# EAGLE board STM32f407layout (EAGLE 7.5.0)
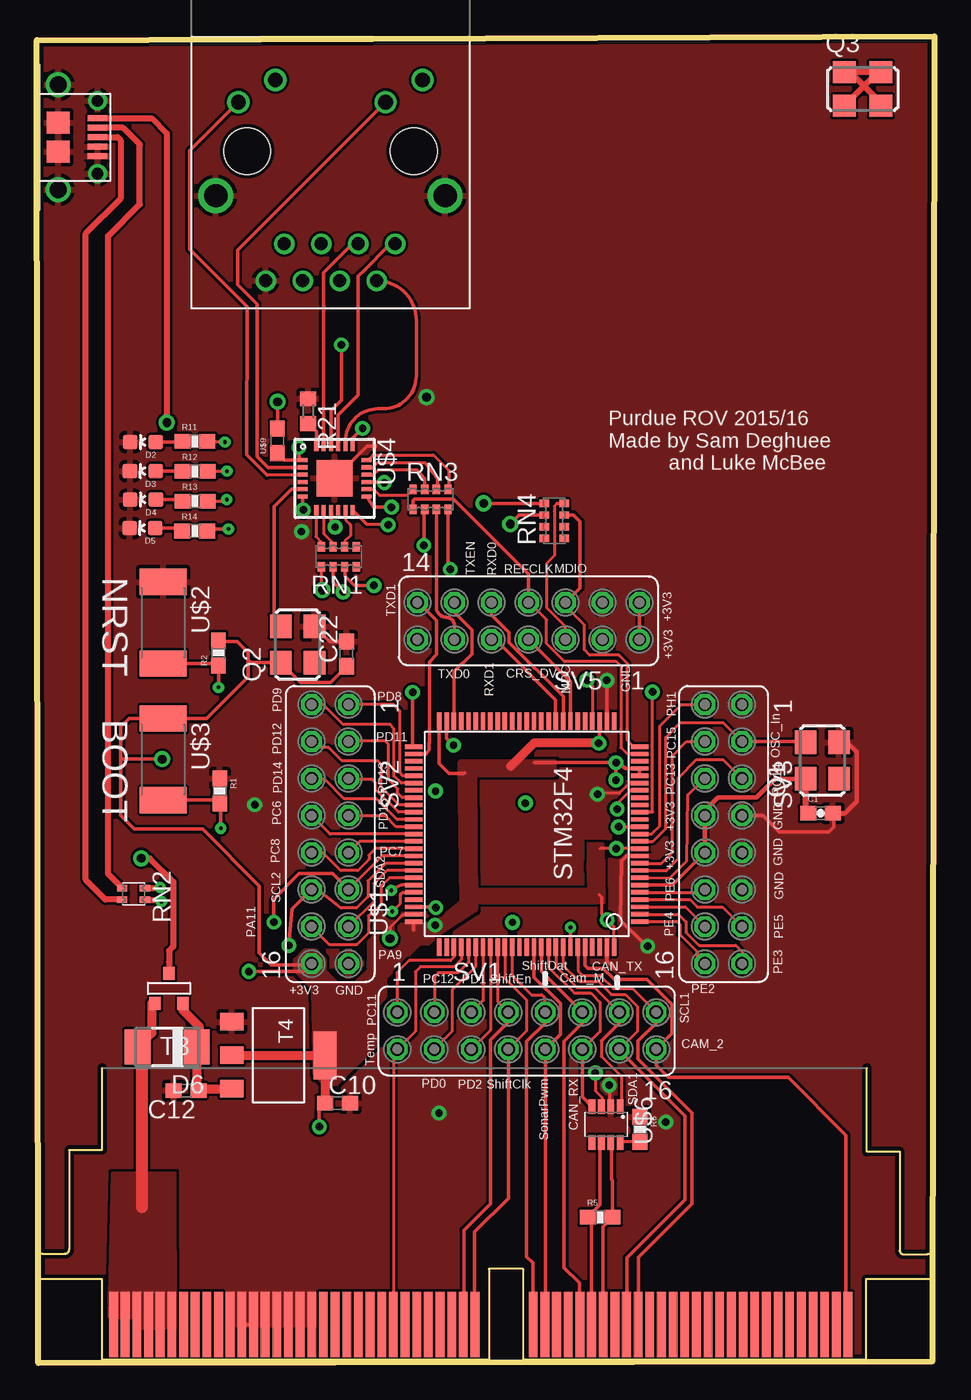
[diagram p0: board, top side]
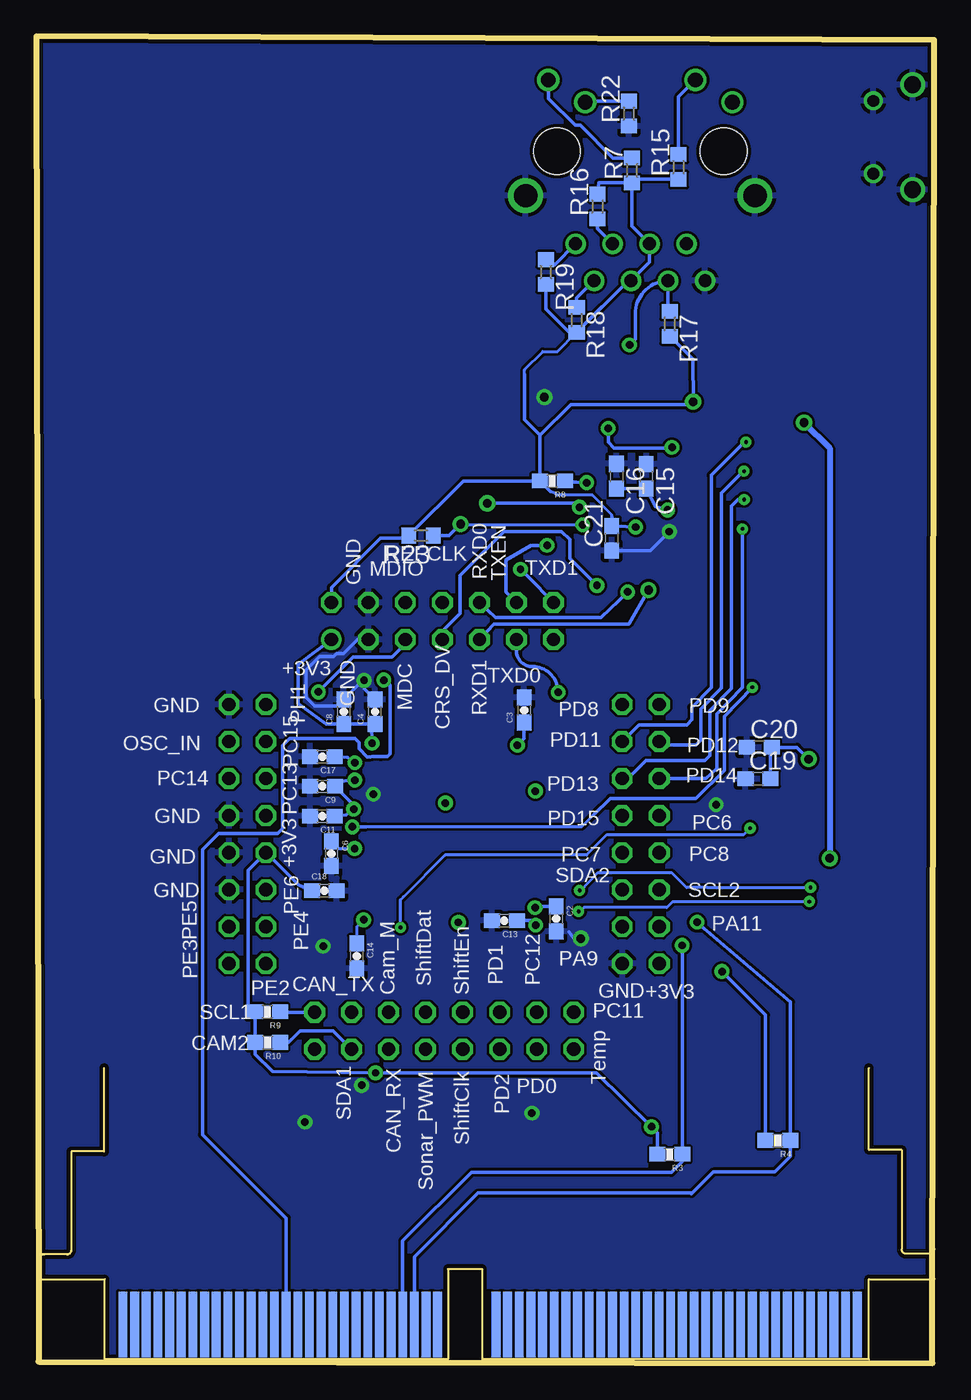
[diagram p1: board, bottom side, seen from below]

Size 61.64 x 91.04 mm. Coordinates in mm from the lower left corner, seen from the top.
Outline: 0.13,0 0.03,90.79 61.64,91.04 61.49,0.1 0.13,0
Copper layers (1*16): Top 0.035mm / dielectric 1.5mm / Bottom 0.035mm
Design rules "GoldPhoenix": minimum track width 7mil, minimum drill 10mil, track to track 7mil, track to pad 7mil, pad to pad 7mil, via to via 7mil, smd to smd 7mil, copper to edge 10mil, drill to drill 8mil, minimum pad ring 10mil, minimum via ring 10mil, stop-mask expansion 4mil, vias tented up to drill 25mil, thermal gap 10mil
Net classes: 1 DiffPair: width 0.254 mm

## Footprints (pad centres in the part's own frame; a part is rotated, then mirrored left to right if it is on the bottom)
0603-CAP = smd 1.1 x 1: 1 -0.85,0; 2 0.85,0
C0603 = smd 1.1 x 1: 1 -0.85,0; 2 0.85,0
LED-0603 = smd 1 x 1: A 0,-0.877; C 0,0.877
DO-214AC = smd 1.8 x 2.4: A 2.025,0; C -2.025,0
ASF = smd 1.6 x 1.5: 1 -1.25,-1.15; 2 1.25,-1.15; 3 1.25,1.15; 4 -1.25,1.15
0603-RES = smd 1.1 x 1: 1 -0.85,0; 2 0.85,0
R0603 = smd 1 x 1.1: 1 -0.85,0; 2 0.85,0
CAY16 = smd 0.5 x 0.65: 1 -1.2,-0.675; 2 -0.4,-0.675; 3 0.4,-0.675; 4 1.2,-0.675; 5 1.2,0.675; 6 0.4,0.675; 7 -0.4,0.675; 8 -1.2,0.675
EXBV4V = smd 0.45 x 0.7: 1 -0.4,-0.775; 2 0.4,-0.775; 3 0.4,0.775; 4 -0.4,0.775
FE08-2 = drill 0.914 octagon: 1 -8.89,1.27; 2 -8.89,-1.27; 3 -6.35,1.27; 4 -6.35,-1.27; 5 -3.81,1.27; 6 -3.81,-1.27; 7 -1.27,1.27; 8 -1.27,-1.27; 9 1.27,1.27; 10 1.27,-1.27; 11 3.81,1.27; 12 3.81,-1.27; 13 6.35,1.27; 14 6.35,-1.27; 15 8.89,1.27; 16 8.89,-1.27
FE07-2 = drill 0.914: 1 -7.62,1.27 | drill 0.914 octagon: 2 -7.62,-1.27; 3 -5.08,1.27; 4 -5.08,-1.27; 5 -2.54,1.27; 6 -2.54,-1.27; 7 0,1.27; 8 0,-1.27; 9 2.54,1.27; 10 2.54,-1.27; 11 5.08,1.27; 12 5.08,-1.27; 13 7.62,1.27; 14 7.62,-1.27
SOT-23 = smd 0.787 x 0.889: 1 0.025,-1.016; 2 -0.94,1.016; 3 0.991,1.016
SOT223 = smd 1.2 x 1.6: GND -2.3,-3.2; VIN 2.3,-3.2; VOUT 0,-3.2 | smd 3.3 x 1.6: TAB 0,3.2
LQFP100 = smd 0.3 x 1.2: P1 -6,-7.75; P2 -5.5,-7.75; P3 -5,-7.75; P4 -4.5,-7.75; P5 -4,-7.75; P6 -3.5,-7.75; P7 -3,-7.75; P8 -2.5,-7.75; P9 -2,-7.75; P10 -1.5,-7.75; P11 -1,-7.75; P12 -0.5,-7.75; P13 0,-7.75; P14 0.5,-7.75; P15 1,-7.75; P16 1.5,-7.75; P17 2,-7.75; P18 2.5,-7.75; P19 3,-7.75; P20 3.5,-7.75; P21 4,-7.75; P22 4.5,-7.75; P23 5,-7.75; P24 5.5,-7.75; P25 6,-7.75; P51 6,7.75; P52 5.5,7.75; P53 5,7.75; P54 4.5,7.75; P55 4,7.75; P56 3.5,7.75; P57 3,7.75; P58 2.5,7.75; P59 2,7.75; P60 1.5,7.75; P61 1,7.75; P62 0.5,7.75; P63 0,7.75; P64 -0.5,7.75; P65 -1,7.75; P66 -1.5,7.75; P67 -2,7.75; P68 -2.5,7.75; P69 -3,7.75; P70 -3.5,7.75; P71 -4,7.75; P72 -4.5,7.75; P73 -5,7.75; P74 -5.5,7.75; P75 -6,7.75 | smd 1.2 x 0.3: P26 7.75,-6; P27 7.75,-5.5; P28 7.75,-5; P29 7.75,-4.5; P30 7.75,-4; P31 7.75,-3.5; P32 7.75,-3; P33 7.75,-2.5; P34 7.75,-2; P35 7.75,-1.5; P36 7.75,-1; P37 7.75,-0.5; P38 7.75,0; P39 7.75,0.5; P40 7.75,1; P41 7.75,1.5; P42 7.75,2; P43 7.75,2.5; P44 7.75,3; P45 7.75,3.5; P46 7.75,4; P47 7.75,4.5; P48 7.75,5; P49 7.75,5.5; P50 7.75,6; P76 -7.75,6; P77 -7.75,5.5; P78 -7.75,5; P79 -7.75,4.5; P80 -7.75,4; P81 -7.75,3.5; P82 -7.75,3; P83 -7.75,2.5; P84 -7.75,2; P85 -7.75,1.5; P86 -7.75,1; P87 -7.75,0.5; P88 -7.75,0; P89 -7.75,-0.5; P90 -7.75,-1; P91 -7.75,-1.5; P92 -7.75,-2; P93 -7.75,-2.5; P94 -7.75,-3; P95 -7.75,-3.5; P96 -7.75,-4; P97 -7.75,-4.5; P98 -7.75,-5; P99 -7.75,-5.5; P100 -7.75,-6
SW_2512 = smd 1.8 x 3.2: 1 -2.8,0; 2 2.8,0
24-QFN = smd 0.28 x 0.69: 1 -1.25,-2.195; 2 -0.75,-2.195; 3 -0.25,-2.195; 4 0.25,-2.195; 5 0.75,-2.195; 6 1.25,-2.195; 13 1.25,2.195; 14 0.75,2.195; 15 0.25,2.195; 16 -0.25,2.195; 17 -0.75,2.195; 18 -1.25,2.195 | smd 0.69 x 0.28: 7 2.195,-1.25; 8 2.195,-0.75; 9 2.195,-0.25; 10 2.195,0.25; 11 2.195,0.75; 12 2.195,1.25; 19 -2.195,1.25; 20 -2.195,0.75; 21 -2.195,0.25; 22 -2.195,-0.25; 23 -2.195,-0.75; 24 -2.195,-1.25 | smd 2.5 x 2.5: VSS_PAD 0,0
MICRO_B = smd 1.5 x 1.55: GND1 -1,1.45; GND2 1,1.45 | drill 0.8: GND3 -2.5,4.15; GND4 2.5,4.15 | drill 1.15: GND7 -3.598,1.45; GND8 3.598,1.45 | smd 0.4 x 1.35: P1 -1.3,4.15; P2 -0.65,4.15; P3 0,4.15; P4 0.65,4.15; P5 1.3,4.15
SOT23-8L = smd 0.45 x 1: 1 -0.975,-1.225; 2 -0.325,-1.225; 3 0.325,-1.225; 4 0.975,-1.225; 5 0.975,1.225; 6 0.325,1.225; 7 -0.325,1.225; 8 -0.975,1.225
J00-0065NL = drill 0.889 pad 1.016: 1 1.27,2.54; 2 0,0; 3 -1.27,2.54; 4 -2.54,0; 5 -3.81,2.54; 6 -5.08,0; 7 -6.35,2.54; 8 -7.62,0 | drill 1.016 pad 1.143: 9 3.15,13.792; 10 0.61,12.268; 11 -6.96,13.792; 12 -9.5,12.268 | drill 1.6 pad 1.727: 15 4.699,5.842; 16 -11.049,5.842 | hole 3.2: -8.89,8.89; 2.54,8.89
HSC8-60PINOUUT = smd 0.6 x 4.5 bottom: B1 0.8,2.4; B2 1.6,2.4; B3 2.4,2.4; B4 3.2,2.4; B5 4,2.4; B6 4.8,2.4; B7 5.6,2.4; B8 6.4,2.4; B9 7.2,2.4; B10 8,2.4; B11 8.8,2.4; B12 9.6,2.4; B13 10.4,2.4; B14 11.2,2.4; B15 12,2.4; B16 12.8,2.4; B17 13.6,2.4; B18 14.4,2.4; B19 15.2,2.4; B20 16,2.4; B21 16.8,2.4; B22 17.6,2.4; B23 18.4,2.4; B24 19.2,2.4; B25 20,2.4; B26 20.8,2.4; B27 21.6,2.4; B28 22.4,2.4; B29 23.2,2.4; B30 24,2.4; B31 24.8,2.4; B32 25.6,2.4; B33 29.6,2.4; B34 30.4,2.4; B35 31.2,2.4; B36 32,2.4; B37 32.8,2.4; B38 33.6,2.4; B39 34.4,2.4; B40 35.2,2.4; B41 36,2.4; B42 36.8,2.4; B43 37.6,2.4; B44 38.4,2.4; B45 39.2,2.4; B46 40,2.4; B47 40.8,2.4; B48 41.6,2.4; B49 42.4,2.4; B50 43.2,2.4; B51 44,2.4; B52 44.8,2.4; B53 45.6,2.4; B54 46.4,2.4; B55 47.2,2.4; B56 48,2.4; B57 48.8,2.4; B58 49.6,2.4; B59 50.4,2.4; B60 51.2,2.4 | smd 0.6 x 4.5: T1 0.8,2.4; T2 1.6,2.4; T3 2.4,2.4; T4 3.2,2.4; T5 4,2.4; T6 4.8,2.4; T7 5.6,2.4; T8 6.4,2.4; T9 7.2,2.4; T10 8,2.4; T11 8.8,2.4; T12 9.6,2.4; T13 10.4,2.4; T14 11.2,2.4; T15 12,2.4; T16 12.8,2.4; T17 13.6,2.4; T18 14.4,2.4; T19 15.2,2.4; T20 16,2.4; T21 16.8,2.4; T22 17.6,2.4; T23 18.4,2.4; T24 19.2,2.4; T25 20,2.4; T26 20.8,2.4; T27 21.6,2.4; T28 22.4,2.4; T29 23.2,2.4; T30 24,2.4; T31 24.8,2.4; T32 25.6,2.4; T33 29.6,2.4; T34 30.4,2.4; T35 31.2,2.4; T36 32,2.4; T37 32.8,2.4; T38 33.6,2.4; T39 34.4,2.4; T40 35.2,2.4; T41 36,2.4; T42 36.8,2.4; T43 37.6,2.4; T44 38.4,2.4; T45 39.2,2.4; T46 40,2.4; T47 40.8,2.4; T48 41.6,2.4; T49 42.4,2.4; T50 43.2,2.4; T51 44,2.4; T52 44.8,2.4; T53 45.6,2.4; T54 46.4,2.4; T55 47.2,2.4; T56 48,2.4; T57 48.8,2.4; T58 49.6,2.4; T59 50.4,2.4; T60 51.2,2.4
0603 = smd 1.1 x 1: 1 -0.85,0; 2 0.85,0

## Placement (x,y rotation side)
C1  [0603-CAP]  53.83,37.73 0 top
C2  0.22uF  [0603-CAP]  25.96,30.49 270 bottom
C3  0.22uF  [0603-CAP]  28.16,44.81 90 bottom
C4  0.1uF  [0603-CAP]  38.4,44.7 90 bottom
C6  0.1uF  [0603-CAP]  41.39,34.96 270 bottom
C8  4.7uF  [0603-CAP]  40.54,44.7 90 bottom
C9  0.1uF  [0603-CAP]  42,39.58 180 bottom
C10  0.22uF  [C0603]  20.66,17.83 0 top
C11  0.1uF  [0603-CAP]  42.01,37.53 180 bottom
C12  0.22uF  [C0603]  10.28,18.7 180 top
C13  0.1uF  [0603-CAP]  29.52,30.37 180 bottom
C14  0.1uF  [0603-CAP]  39.66,27.93 270 bottom
C15  1uF  [C0603]  19.78,60.86 270 bottom
C16  1nF  [C0603]  21.83,60.86 270 bottom
C17  1uF  [0603-CAP]  42.01,41.62 180 bottom
C18  0.1uF  [0603-CAP]  41.87,32.41 0 bottom
C19  100nF  [C0603]  12.11,40.1 0 bottom
C20  100nF  [C0603]  12.03,42.25 0 bottom
C21  100nF  [C0603]  22.14,56.6 90 bottom
C22  0.01uF  [C0603]  21.29,48.67 90 top
D2  [LED-0603]  7.32,63.21 90 top
D3  [LED-0603]  7.3,61.21 90 top
D4  [LED-0603]  7.32,59.25 90 top
D5  [LED-0603]  7.27,57.31 90 top
D6  [DO-214AC]  8.98,21.69 180 top
Q1  ASF  [ASF]  53.94,41.35 90 top
Q2  ASV-8  [ASF]  17.93,49.31 90 top
Q3  ASF  [ASF]  56.71,87.43 0 top
R1  10k  [0603-RES]  12.58,39.26 270 top
R2  10k  [0603-RES]  12.5,48.74 90 top
R3  4.7K  [0603-RES]  18.16,14.33 180 bottom
R4  4.7K  [0603-RES]  10.75,15.29 180 bottom
R5  120  [0603-RES]  38.7,10.01 0 top
R6  100K  [0603-RES]  41.42,16.05 270 top
R7  250R  [R0603]  20.77,81.85 90 bottom
R8  10K  [0603-RES]  26.23,60.54 180 bottom
R9  4.7K  [0603-RES]  45.78,24.11 180 bottom
R10  4.7K  [0603-RES]  45.77,22.01 180 bottom
R11  83  [0603-RES]  10.88,63.24 0 top
R12  83  [0603-RES]  10.89,61.19 0 top
R13  83  [0603-RES]  10.89,59.15 0 top
R14  83  [0603-RES]  10.87,57.1 0 top
R15  250R  [R0603]  17.56,82.08 90 bottom
R16  49.9R  [R0603]  23.13,79.37 90 bottom
R17  49.9R  [R0603]  18.17,71.32 270 bottom
R18  49.9R  [R0603]  24.55,71.59 270 bottom
R19  49.9R  [R0603]  26.67,74.88 270 bottom
R21  12.1K  [R0603]  18.65,65.32 270 top
R22  4.7K  [R0603]  20.97,85.75 90 bottom
R23  1.5k  [R0603]  35.24,56.79 180 bottom
RN1  [CAY16]  20.76,55.34 0 top
RN2  [EXBV4V]  6.67,32.2 270 top
RN3  [CAY16]  27.05,59.28 180 top
RN4  [CAY16]  35.54,57.8 270 top
SV1  [FE08-2]  33.66,22.8 0 top
SV2  [FE08-2]  20.16,36.3 270 top
SV3  [FE08-2]  47.16,36.3 270 top
SV5  [FE07-2]  33.77,50.93 180 top
T3  FDN340P  [SOT-23]  9.13,25.71 180 top
T4  AP1117_LIN_REG  [SOT223]  16.61,21.12 270 top
U$1  STM32F4  [LQFP100]  33.66,36.3 90 top
U$2  SWITCH  [SW_2512]  8.7,50.81 270 top
U$3  SWITCH  [SW_2512]  8.7,41.43 270 top
U$4  LAN8720LAN8720  [24-QFN]  20.46,60.72 270 top
U$5  MICROUSB  [MICRO_B]  0.05,84.12 270 top
U$6  MAX3051MAX3051  [SOT23-8L]  39.11,16.37 180 top
U$7  J00-0065NL  [J00-0065NL]  23.36,74.27 0 top
U$8  HSC8PART-60  [HSC8-60PINOUUT]  4.5,0.25 0 top
U$9  [0603]  16.55,63.29 90 top

## Library data of the parts
C1-C4 C6 C8 C9 C11 C13 C14 C17 C18 R1-R6 R8-R14 = SparkFun-Passives
C10 C12 = rcl
C15 C16 C19-C21 = eagle-ltspice; SPICEMODEL: NONE; SPICEPREFIX: C
C22 R7 R15-R19 R21-R23 = resistor
D2-D5 = SparkFun-LED
D6 U$2 U$3 = DiscreteComponents
Q1 Q3 = DiscreteComponents; DIGIKEY: 535-10066-1-ND
Q2 = MicroBoard; DIGIKEY: 535-10066-1-ND
RN1 RN3 RN4 = resistor-dil; OC_FARNELL: unknown; OC_NEWARK: unknown
RN2 = DiscreteComponents; DIGIKEY: RHM1381CT-ND; MF: Rohm Semiconductor; MPN: MNR12ERAPJ220
SV1-SV3 SV5 = con-lsta; OC_FARNELL: unknown; OC_NEWARK: unknown
T3 = DiscreteComponents; DIGIKEY: FDN340PCT-ND
T4 = PowerComponents
U$1 U$5 = Other
U$4 U$7 U$9 = EthernetChip
U$6 = MAX3051 Library
U$8 = Connectors

## Nets
+3V3: C1.1 C4.1 C6.1 C8.1 C9.1 C10.1 C11.1 C13.1 C14.1 C17.1 C18.1 C19.2 C20.2 C21.2 C22.1 Q1.4 Q2.4 R2.2 R3.2 R4.2 R7.1 R8.2 R9.2 R10.2 R15.1 R16.2 R17.2 R18.2 R19.2 R23.2 SV2.16 SV3.8 SV3.10 SV5.1 SV5.2 T4.TAB T4.VOUT U$1.P6 U$1.P11 U$1.P19 U$1.P21 U$1.P22 U$1.P28 U$1.P50 U$1.P75 U$1.P100 U$3.1 U$4.9 U$6.3 U$7.4 U$7.5 U$9.2
+5V: D6.A T3.3 U$8.T1 U$8.T2 U$8.T3 U$8.T4 U$8.T5 U$8.T6
ALT_CAMERA_SERVO_MOTOR_PWM: SV1.16 U$1.P96 U$8.T60
BUS_SPEED: R22.2 U$4.2 U$7.10
CAN_RX: SV1.12 U$1.P91 U$6.4
CAN_TX: SV1.13 U$1.P92 U$6.1
CANH1: R5.2 U$6.7 U$8.T39
CANL1: R5.1 U$6.6 U$8.T38
CRS_DV: RN1.3 SV5.7 U$1.P32
DIFF_RD+ [DiffPair]: R16.1 U$4.23 U$7.3
DIFF_RD- [DiffPair]: R17.1 U$4.22 U$7.6
DIFF_TD+ [DiffPair]: R19.1 U$4.21 U$7.1
DIFF_TD- [DiffPair]: R18.1 U$4.20 U$7.2
GND: C1.2 C2.2 C3.2 C4.2 C6.2 C8.2 C9.2 C10.2 C11.2 C12.2 C13.2 C14.2 C15.1 C16.1 C17.2 C18.2 C19.1 C20.1 C21.1 C22.2 D2.C D3.C D4.C D5.C Q1.2 Q2.2 R1.1 R6.1 R21.1 R22.1 SV2.15 SV3.1 SV3.7 SV3.9 SV3.11 SV5.3 SV5.4 T4.GND U$1.P10 U$1.P20 U$1.P27 U$1.P74 U$1.P99 U$2.1 U$4.VSS_PAD U$5.GND1 U$5.GND2 U$5.GND3 U$5.GND4 U$5.GND7 U$5.GND8 U$5.P4 U$5.P5 U$6.2 U$7.8 U$7.15 U$7.16 U$8.T11 U$8.T12 U$8.T13 U$8.T14 U$8.T15 U$8.T16 U$8.T17 U$8.T18
GREEN: R7.2 U$7.9
I2C1_SCL: R9.1 SV1.15 U$1.P95 U$8.T42
I2C1_SDA: R10.1 SV1.14 U$1.P93 U$8.T41
I2C3_SCL: R3.1 SV2.12 U$1.P67 U$8.B36
I2C3_SDA: R4.1 SV2.11 U$1.P66 U$8.B35
LINK/ACT: U$4.3 U$7.12
MAIN_CAMERA_SERVO_MOTOR_PWM: SV1.11 U$1.P90 U$8.T37
MDC: RN4.8 SV5.5 U$1.P16
MDE: RN4.1 U$4.13
MDIO: RN4.7 SV5.6 U$1.P25
N$1: C2.1 U$1.P73
N$2: C3.1 U$1.P49
N$3: R1.2 U$1.P94 U$3.2
N$4: R2.1 U$1.P14 U$2.2
N$6: C15.2 C16.2 U$4.6
N$9: RN1.6 U$4.11
N$11: R6.2 U$6.8
N$12: RN2.1 U$5.P2
N$13: RN3.4 U$4.14
N$14: D3.A R12.1
N$15: D5.A R14.1
N$16: RN3.3 U$4.16
N$17: D4.A R13.1
N$18: D2.A R11.1
N$19: RN3.2 U$4.17
N$20: RN3.1 U$4.18
N$21: U$4.1 U$4.19 U$9.1
N$22: R21.2 U$4.24
N$23: R23.1 RN4.2 U$4.12
N$24: RN2.2 U$5.P3
N$25: RN1.7 U$4.8
N$26: RN1.8 U$4.7
N$28: Q3.1 Q3.2 Q3.3 Q3.4
N$57: T3.1 U$5.P1
N$58: C12.1 D6.C T3.2 T4.VIN
NRST: R8.1 U$4.15
OSC_IN: Q1.3 SV3.3 U$1.P12
PA0: U$1.P23
PA3: U$1.P26
PA5: U$1.P30
PA6: U$1.P31
PA9: SV2.13 U$1.P68
PA10: SV2.14 U$1.P69
PA13: U$1.P72
PA14: U$1.P76
PA15: U$1.P77
PB0: U$1.P35
PB1: U$1.P36
PB2: U$1.P37
PB10: U$1.P47
PB14: U$1.P53
PB15: U$1.P54
PC0: U$1.P15
PC2: U$1.P17
PC3: U$1.P18
PC6: SV2.8 U$1.P63
PC7: SV2.9 U$1.P64
PC8: SV2.10 U$1.P65
PC10: SV1.1 U$1.P78
PC12: SV1.3 U$1.P80
PC13: SV3.6 U$1.P7
PC14: SV3.5 U$1.P8
PC15: SV3.4 U$1.P9
PD0: SV1.4 U$1.P81
PD1: SV1.5 U$1.P82
PD2: SV1.6 U$1.P83
PD6: U$1.P87
PD7: U$1.P88
PD8: SV2.1 U$1.P55
PD9: SV2.2 U$1.P56
PD10: U$1.P57
PD11: R11.2 SV2.3 U$1.P58
PD12: R12.2 SV2.4 U$1.P59
PD13: R13.2 SV2.5 U$1.P60
PD14: R14.2 SV2.6 U$1.P61
PD15: SV2.7 U$1.P62
PE0: U$1.P97
PE1: U$1.P98
PE2: SV3.16 U$1.P1
PE3: SV3.15 U$1.P2
PE4: SV3.14 U$1.P3
PE5: SV3.13 U$1.P4
PE6: SV3.12 U$1.P5
PE7: U$1.P38
PE8: U$1.P39
PE9: U$1.P40
PE10: U$1.P41
PE11: U$1.P42
PE12: U$1.P43
PE13: U$1.P44
PE14: U$1.P45
PE15: U$1.P46
PH1: SV3.2 U$1.P13
REFCLK: RN3.5 SV5.8 U$1.P24
RXD0: RN1.2 SV5.10 U$1.P33
RXD1: RN1.1 SV5.9 U$1.P34
RXERR: U$4.10
SHIFTREG_CLK: SV1.8 U$1.P85 U$8.T32
SHIFTREG_DATA: SV1.9 U$1.P86 U$8.T33
SHIFTREG_ENABLE: SV1.7 U$1.P84 U$8.T31
SONAR_DAC: U$1.P29 U$8.B46
SONAR_PWM: SV1.10 U$1.P89 U$8.T34
TEMP_BACKUP: SV1.2 U$1.P79 U$8.T25
TXD0: RN3.7 SV5.11 U$1.P51
TXD1: RN3.8 SV5.14 U$1.P52
TXEN: RN3.6 SV5.12 U$1.P48
USB_D+: RN2.3 U$1.P71
USB_D-: RN2.4 U$1.P70
XTAL1: Q2.3 U$4.5
XTAL2: U$4.4
YELLOW: R15.2 U$7.11

## Tracks (layer width: path | path; a pad name or v marks a point on that pad's centre or on a via)
+3V3  (via drill 0.51, 0.6)
  Top 0.203: v38.36,19.92 38.36,18.68 38.8,18.24 38.8,17.61 U$6.3 | U$1.P19 40.76,39.31 39.93,38.48 39.9,38.23 v39.86,38.02 | U$1.P100 39.66,29.93 v39.17,30.42 38.83,30.76 38.83,31.95 38.62,32.15 | U$1.P11 41.39,35.31 v39.8,35.31 38.69,35.31
  Top 0.254: U$1.P75 25.88,30.3 25.88,29.74 | U$1.P50 27.63,42.89 27.63,41.15 28.31,40.47 29.33,40.47 29.37,40.51 | 5.8,41.52 5.8,43.68 6.35,44.23 U$3.1 11.69,44.23 14.53,47.08 14.53,48.25 | 5.8,41.52 5.8,37.57 6.72,36.65 11.39,36.65 15.3,32.75 15.3,28.16 16.12,27.33 18.8,27.33 SV2.16 18.35,26.88 v14.59,26.88 | 14.53,48.25 14.53,48.75 13.76,49.52 12.57,49.52 R2.2 | v39.79,41.2 39.84,41.16 39.89,41.17 40.45,40.8 U$1.P22 U$1.P21 | U$1.P28 38.66,42.56 v38.6,42.54 | v19.42,16.22 19.42,17.44 C10.1 | U$4.9 20.21,57.82 v20.5,57.37 | U$9.2 v16.55,65.96 v16.56,65.97 | v8.63,41.45 5.88,41.45 5.8,41.52 | SV5.2 SV5.1 | C22.1 21.29,47.79 20.2,46.7 18.15,46.7 Q2.4 14.72,48.06 14.53,48.25 | U$1.P6 43.66,32.8 SV3.10 | v39.78,40.01 39.78,40.12 v39.79,41.2 | 34.19,41.2 v39.79,41.2
  Top 0.305: Q1.4 50.68,40.08 49.41,38.81 46.76,38.81 45.89,37.93 SV3.8 SV3.10
  Top 0.406: Q1.4 52.79,37.92 C1.1
  Top 0.61: T4.VOUT T4.TAB C10.1 | v38.6,42.54 34.14,42.54 32.57,40.97
  Bottom 0.203: 26.35,59.81 26,59.67 25.89,59.56 23.49,59.56 22.14,58.21 22.14,58.09 | v39.17,30.42 39.66,29.94 C14.1 | C6.1 40.88,35.31 v39.8,35.31 | 28.14,67.88 28.14,68.17 26.87,69.43 25.86,69.43 R18.2
  Bottom 0.254: v38.6,42.54 38.65,43.79 C4.1 C8.1 41.77,43.85 43.68,45.28 43.68,47.95 SV5.1 | C17.1 40.29,41.56 v39.79,41.2 | C13.1 27.68,30.37 v27.37,30.06 | R4.2 11.6,23.89 v14.59,26.88 | v20.5,57.37 21.87,57.46 C21.2 22.14,58.09 | U$7.4 19.55,75.54 U$7.5 20.77,78.03 R7.1 | U$7.4 20.76,74.27 20.76,74.33 20.78,74.35 20.93,74.35 24.76,70.52 | R15.1 20.53,81.23 R7.1 | R7.1 23.05,81 R16.2 | 26.35,59.81 R8.2 | R8.2 27.08,63.67 | R8.2 32.34,60.54 R23.2 | R23.2 36.09,56.48 | C19.2 11.26,42.17 C20.2 9.44,42.25 v8.63,41.45 | C11.1 40.38,37.61 v39.86,38.02 39.97,38.4 C9.1 40.81,39.92 v39.78,40.01 | R17.2 16.59,68.89 v16.56,65.97 16.75,65.79 24.96,65.79 27.08,63.67 | U$7.4 21.12,74.27 | 24.17,70.35 R18.2 | R18.2 25.09,70.74 26.67,72.32 R19.2 | U$7.4 21.02,74.27 R18.2 | SV5.2 41.39,53.24 38.02,56.61 36.27,56.61 R23.2 | R3.2 19.01,15.81 v19.42,16.22 23.21,19.92 v38.36,19.92 45.44,20.01 46.63,21.2 R10.2 R9.2 47.12,24.61 47.12,33.8 SV3.10 43.66,32.8 C18.1 | 28.14,67.88 28.14,64.74 27.08,63.67
  pour Top (no thermals): 19.07,25.69 17.81,26.95 17.81,27.64 18.45,28.28 19.09,28.28 19.71,27.66 19.71,26.88 20.58,26.01 21.96,26.01 22.9,26.95 22.9,28.9 23.93,29.93 23.93,29.93 24.29,30.07 26.68,30.04 27.67,30.35 29.25,31.63 29.11,41.24 35.5,41.29 35.5,40.4 31.51,40.41 30.38,40.38 30.04,40.4 30.09,31.12 27.61,29.49 27.5,29.49 26.83,28.83 26.26,28.83 23.86,26.43 23.86,25.14 23.26,24.55 23.26,21.91 20.54,19.19 19.83,19.19 19.16,19.85 19.16,21.09
  pour Top: 29.92,31.62 39,31.62 38.9,35.62 37.84,35.66 37.86,34.19 37.82,34.25 37.88,32.51 29.89,32.51 29.89,31.61
+5V
  Top 0.254: D6.A | T3.3 7.91,24.7
  Top 0.61: 7.91,24.7 7.91,22.65 D6.A
  Top 0.813: D6.A 7.23,21.69 7.23,10.71
  pour Top (no thermals): 6.98,2.34 9.52,2.42 9.48,13.06 5.25,13.02 4.99,3.17 6.92,3.06 6.94,2.4
ALT_CAMERA_SERVO_MOTOR_PWM
  Top 0.254: U$1.P96 37.66,27.3 37.87,27.09 38.9,27.09 39.67,26.32 41.92,26.32 43.62,24.61 43.62,22.61 SV1.16 42.55,20.42 43.37,19.59 51.61,19.59 55.56,15.64 55.56,2.79 U$8.T60
BUS_SPEED
  Top 0.254: U$4.2 15.9,61.47 15.15,62.22 15.15,72.69 13.82,74.01 13.82,76.39 U$7.10
  Bottom 0.254: R22.2 23.91,86.6 U$7.10
CAN_RX
  Top 0.203: U$1.P91 35.16,27.17 36.92,25.4 38.05,25.4 38.69,24.76 38.69,22.76 SV1.12
  Top 0.254: SV1.12 37.47,18.26 U$6.4
CAN_TX
  Top 0.203: U$1.P92 35.66,27.22 37.09,25.79 38.29,25.79 SV1.13 | 38.77,22.11 38.77,21.04 40.14,19.67 40.14,17.65 U$6.1
  Top 0.254: SV1.13 40.01,23.34 38.77,22.11 | 40.06,17.62 U$6.1
CANH1
  Top 0.254: U$6.7 39.48,15.09 39.48,12.61 39.55,12.54 R5.2 38.9,9.36 U$8.T39
CANL1
  Top 0.254: U$6.6 38.69,15.05 38.69,10.85 R5.1 38.1,9.76 U$8.T38
CRS_DV  (via drill 0.51)
  Top 0.254: 21.25,54.39 RN1.3 21.18,54.64 21.18,54.02 21.84,53.36 v23.17,53.36 | SV5.7 36.66,46.77 U$1.P32
  Bottom 0.254: SV5.7 33.77,50.24 32.57,51.44 32.57,54.05 29.55,57.08 25.6,57.08 25.02,56.5 25.02,55.22 v23.17,53.36
DIFF_RD+
  Top 0.254: U$4.23 19.71,74.83 21.69,76.81 U$7.3
  Bottom 0.254: U$7.3 23.13,77.85 R16.1
DIFF_RD-  (via drill 0.51)
  Top 0.254: U$4.22 20.21,65.38 20.93,66.1 v20.93,69.88
  Bottom 0.254: 18.28,72.28 R17.1 arc90 18.28,72.28 | 18.28,72.28 U$7.6 U$7.6 arc-90 20.54,72.01 20.54,70.28 v20.93,69.88
DIFF_TD+
  Top 0.254: U$4.21 20.71,65.06 22.08,66.44 22.08,74.59 22.21,74.72 22.37,74.88 24.3,76.81 U$7.1
  Bottom 0.254: R19.1 26.06,75.38 U$7.1
DIFF_TD-
  Top 0.254: 23.28,74.19 U$7.2 arc-90 26.07,71.56 26.07,67.76 arc-90 23.8,65.49 23.43,65.49 arc90 21.21,63.27 U$4.20
  Bottom 0.254: R18.1 24.56,73.08 U$7.2
GND  (via drill 0.51, 0.6)
  Top 0.203: v39.32,19.07 39.32,17.71 U$6.2 | U$1.P74 25.85,30.75 25.14,30.75 24.27,29.88 v24.27,29.13 | U$1.P20 40.72,39.81 40.02,39.11 38.58,39.1 v38.52,39.04
  Top 0.254: SV3.7 49.86,37.57 50.99,36.44 54.41,36.46 54.75,36.8 54.75,37.66 C1.2 | U$1.P99 39.16,27.61 39.19,27.57 39.19,27.55 C14.2 | 38.53,39.05 v38.52,39.04 | U$1.P27 39.14,46.15 v39.15,46.85 | 18.29,56.97 arc90 v18.2,57.07 | U$4.VSS_PAD 22.68,62.94 23.29,62.94 23.29,62.9 | C22.2 20.12,49.52 Q2.2 | U$1.P10 40.5,34.8 40.14,34.44 40.1,30.39 41.67,28.82 | 14.42,2.65 14.43,2.66 | 15.1,2.84 14.87,2.61 14.13,2.61 13.95,2.79 13.95,2.65 14.04,2.56 | 15.86,2.65 15.74,2.54 15.66,2.54 15.6,2.59 15.64,2.59 15.68,2.64 | 14.04,2.65 14.03,2.65 14.11,2.65 14.13,2.67 14.05,2.67 14.01,2.71
  Top 0.305: Q1.2 55.63,42.6 56.31,41.92 56.31,38.54 55.48,37.71 54.7,37.71 C1.2
  Bottom 0.254: v38.52,39.04 38.52,38.69 38.51,38.68 | v18.2,57.07 19.51,55.75 C21.1 | SV5.3 39.58,49.66 40.55,48.69 41.03,48.69 41.23,48.49 42.21,48.49 43.13,47.57 43.13,45.68 42.53,45.09 41.01,45.09 C8.2 39.37,46.73 39.37,46.78 v39.15,46.85 39.15,46.31 C4.2 | v24.27,29.13 24.75,29.13 25.09,29.59
  other vias: 14.98,38.32 41.95,28.62 27.63,17.16 43.2,16.54 26.78,66.29
  pour Bottom (rank 6): 0.12,0.13 61.39,0.16 61.61,90.99 0.18,90.81
  pour Top (rank 6): 61.47,0.12 61.73,90.95 0.15,90.66 0.07,0.16
  pour Top: 13.31,2.71 16.38,2.58 16.66,2.86
  pour Top (no thermals): 13.35,2.65 19.36,2.52 19.36,8.78 12.98,8.83 12.98,2.58
GREEN
  Bottom 0.254: R7.2 22.06,82.7 24.3,84.94 24.65,84.94 26.49,86.78 26.49,88.04 U$7.9
I2C1_SCL
  Top 0.203: SV1.15 40.91,25.71 39.6,25.71 38.7,26.61 37.49,26.61 37.18,26.92 37.18,28.53 U$1.P95
  Top 0.254: SV1.15 42.55,23.36 41.28,22.1 41.28,20.87 44.98,17.17 44.98,10.92 41.34,7.28 41.34,2.69 U$8.T42
  Bottom 0.254: R9.1 44.89,24.07 SV1.15
I2C1_SDA
  Top 0.203: U$1.P93 36.16,27.3 37.28,26.19 38.57,26.19 39.46,25.3 40.42,25.3 41.24,24.48 41.24,22.77 SV1.14
  Top 0.254: SV1.14 40.01,21.47 44.52,16.95 44.52,11.22 40.53,7.23 40.53,2.69 U$8.T41
  Bottom 0.254: R10.1 44.33,22.01 43.54,22.8 41.27,22.8 SV1.14
I2C3_SCL  (via drill 0.51)
  Top 0.203: U$1.P67 23.96,34.3 22.75,33.09 22.75,31.99 22.73,31.98 22.72,31.98 21.97,31.23 20.92,31.23 20.24,31.77 19.31,32.51 SV2.12
  Top 0.254: v17.32,28.66 17.56,31.17 SV2.12
  Bottom 0.254: v17.32,28.66 17.31,28.93 R3.1 17.31,13.83 18.06,13.09 31.79,13.09 36.49,8.39 U$8.B36 36.46,2.92
I2C3_SDA  (via drill 0.51)
  Top 0.203: U$1.P66 23.74,34.8 SV2.11
  Top 0.254: v16.29,30.25 16.28,31.84 18.04,33.6 20.32,33.6 SV2.11
  Bottom 0.254: v16.29,30.25 9.88,24.77 R4.1 9.9,14.18 10.96,13.12 15.18,13.12 16.68,11.63 16.72,11.67 31.32,11.67 35.7,7.29 U$8.B35
LINK/ACT
  Top 0.254: U$4.3 15.83,60.93 14.41,62.35 14.46,72.51 10.53,76.44 10.53,83.21 U$7.12
MAIN_CAMERA_SERVO_MOTOR_PWM
  Top 0.254: U$1.P90 34.66,26.88 SV1.11 37.47,23.33 36.22,22.09 36.22,6.55 37.28,5.5 37.28,2.68 U$8.T37
MDC  (via drill 0.51)
  Top 0.203: 42.29,37.85 v42.29,46.06 | 36.29,49.68 36.29,50.57 35.02,51.84 35.02,52.66 35.02,54.88 35.55,55.41 35.55,58.45 35.55,58.81 35.74,59
  Top 0.254: 42.29,37.8 U$1.P16 41.42,37.82 42.27,37.82 42.29,37.85 | RN4.8 35.74,59 | 36.29,49.68 SV5.5
  Bottom 0.254: v42.29,46.06 39.91,48.44 37.24,48.44 36.31,49.37 SV5.5
MDE  (via drill 0.51, 0.6)
  Top 0.254: RN4.1 v30.71,59 v30.7,59.01 | v24.37,58.74 23.14,58.74 U$4.13
  Bottom 0.254: v30.7,59.01 24.42,59.01 v24.37,58.74
MDIO
  Top 0.203: 36.31,51.95 37.61,50.65 37.61,48.95 37.97,48.59 39.98,48.59 40.57,48 40.57,42.71 40.98,42.3 U$1.P25
  Top 0.254: 36.31,51.95 SV5.6 37.31,53.2 37.31,57.75 36.86,58.2 RN4.7
N$1  (via drill 0.51)
  Top 0.254: U$1.P73 27.12,31.3 v27.42,31.25
  Bottom 0.254: C2.1 27.14,31.33 v27.42,31.25
N$2  (via drill 0.51)
  Top 0.254: U$1.P49 28.16,42.88 v28.63,42.41
  Bottom 0.254: v28.63,42.41 28.16,42.87 C3.1
N$3  (via drill 0.25)
  Top 0.254: U$1.P94 v36.65,29.9 | U$3.2 12.58,38.63 R1.2 12.65,38.33 v12.65,36.71
  Bottom 0.203: v36.65,29.9 36.65,31.8 36.45,31.99 33.58,34.86 23.87,34.86 22.47,36.26 13.1,36.26 v12.65,36.71
N$4  (via drill 0.25, 0.51)
  Top 0.254: U$2.2 12.5,48.01 R2.1 12.49,47.88 v12.49,46.37 | U$1.P14 v39.96,36.8
  Bottom 0.203: 23.4,37.61 24.22,36.8 v39.96,36.8
  Bottom 0.254: 23.4,37.61 22.25,38.76 16.39,38.76 14.43,40.67 14.43,44.38 v12.49,46.37 | v39.96,36.8 39.03,36.8
N$6  (via drill 0.51)
  Top 0.254: U$4.6 18.27,58.84 v18.31,58.55
  Bottom 0.254: v18.31,58.55 19.16,58.78 C15.2 C16.2
N$7  (via drill 0.51)
  other vias: 27.39,39.25
N$8  (via drill 0.51)
  other vias: 32.68,30.24
N$9
  Top 0.203: 21.21,56.07 RN1.6 21.16,56.4 21.55,56.79 21.55,57.54 21.51,57.58 21.51,57.59 21.23,57.86 21.23,58.51 U$4.11
N$10  (via drill 0.51)
  other vias: 33.56,38.43
N$11
  Top 0.254: R6.2 40.15,15.21 U$6.8
N$12
  Top 0.406: U$5.P2 5.96,84.77 7.1,83.64 7.1,79.52 4.92,77.34 4.92,33.57 RN2.1
N$13
  Top 0.203: U$4.14 23.02,59.97 23.13,59.98 23.54,59.57 25.45,59.56 RN3.4 25.58,59.68
N$14
  Top 0.254: D3.A 10.03,61.21 R12.1
N$15
  Top 0.254: D5.A 10.02,57.31 R14.1
N$16
  Top 0.203: U$4.16 22.68,60.95 23.07,60.95 23.55,61.31 26.13,61.3 26.4,60.97
  Top 0.254: 26.4,60.97 26.65,60.72 RN3.3
N$17
  Top 0.254: D4.A 10.04,59.25 R13.1
N$18
  Top 0.254: D2.A 10.02,63.21 R11.1
N$19
  Top 0.203: U$4.17 23.08,61.47 23.4,61.79 26.69,61.78 27.54,60.71
  Top 0.254: 27.54,60.71 27.54,60.04 RN3.2
N$20
  Top 0.203: U$4.18 22.73,61.97 23.09,62.33 27.24,62.33 28.31,61.26
  Top 0.254: 28.31,61.26 28.31,60.01 RN3.1
N$21  (via drill 0.51)
  Top 0.254: U$9.1 17.02,61.97 U$4.1 18.02,62.17 v18.01,62.84 | U$4.19 21.71,63.47 v22.39,64.15
  Bottom 0.254: v22.39,64.15 22.39,63.2 21.99,62.8 17.99,62.81 v18.01,62.84
N$22
  Top 0.254: U$4.24 19.21,63.92 R21.2
N$23  (via drill 0.51, 0.6)
  Top 0.203: 22.66,57.58 24.09,57.58 v24.14,57.53
  Top 0.254: U$4.12 22.66,57.58 | v32.52,57.58 33.14,58.2 RN4.2
  Bottom 0.203: v24.14,57.53 32.46,57.53 v32.52,57.58
  Bottom 0.254: R23.1 33.32,56.79 v32.52,57.58
N$24
  Top 0.406: RN2.2 5.88,31.82 4.72,31.82 3.4,33.15 3.4,77.53 5.78,79.91 5.78,83.92 5.56,84.13 U$5.P3
N$25
  Top 0.203: 20.23,56.14 RN1.7 20.36,56.28 19.71,56.92 U$4.8
N$26
  Top 0.203: U$4.7 19.19,58.51 19.19,56.71 19.56,56.35 RN1.8
N$28
  Top 0.406: Q3.4 55.86,88.58 58.43,86.01 58.23,86.01 Q3.2 | Q3.3 57.76,88.58 | 57.76,88.58 Q3.1 | 57.76,88.58 Q3.4 | Q3.4 54.91,88.58 54.88,88.55 55.43,88.55 Q3.4
N$57  (via drill 0.6)
  Top 0.406: T3.1 9.1,27.52 9.09,27.52 9.09,28.3 9.39,28.59 9.39,33.04 7.79,34.64 v7.19,34.64 | U$5.P1 7.93,85.42 8.95,84.4 8.95,65.09 v8.95,64.54
  Bottom 0.406: v7.19,34.64 7.19,62.78 v8.95,64.54
N$58
  Top 0.254: 13.29,18.7 T4.VIN
  Top 0.61: 11,18.83 T4.VIN | 11,18.83 D6.C 11.16,21.85 11.16,23.12 10.07,24.22 T3.2 | 11,18.83 C12.1
NRST  (via drill 0.51)
  Top 0.254: U$4.15 23.73,60.47 v23.87,60.42
  Bottom 0.254: v23.87,60.42 24.6,60.45 24.61,60.47 25.31,60.47 R8.1
OSC_IN
  Top 0.203: U$1.P12 42.32,35.8 43.2,36.69 43.2,42.93 44.22,43.95 47.13,43.95 SV3.3
  Top 0.254: SV3.3 52.72,42.67 Q1.3
PA9
  Top 0.203: U$1.P68 24.06,33.8 23.17,32.91 23.17,31.7 SV2.13
PA10
  Top 0.203: U$1.P69 24.23,33.3 23.67,32.74 23.67,31.45 22.78,30.7 22.78,29.52 21.97,28.71 20.13,28.71 SV2.14
PC6
  Top 0.203: U$1.P63 20.16,36.3 SV2.8
PC7
  Top 0.203: U$1.P64 22.2,35.8 SV2.9
PC8
  Top 0.203: U$1.P65 23.26,35.3 22.83,34.87 22.83,34.57 22.06,33.81 20.89,33.81 19.68,35.01 18.91,35.01 SV2.10
PC10
  Top 0.203: U$1.P78 28.66,27.86 28.42,27.63 25.58,27.63 24.75,26.81 24.75,24.09 SV1.1
PC12
  Top 0.203: U$1.P80 29.66,27.97 | SV1.3 27.31,26.5 27.6,26.79 28.95,26.79 29.66,27.5 29.66,27.78 29.66,27.97 | 29.66,27.97
PC13
  Top 0.203: U$1.P7 43.53,33.34 44.64,34.45 44.7,38.99 SV3.6
PC14
  Top 0.203: U$1.P8 43.25,33.8 44.05,34.62 44.05,40.16 45.31,41.42 47.12,41.42 SV3.5
PC15
  Top 0.203: U$1.P9 42.91,34.3 43.64,35.03 43.64,41.67 44.62,42.65 SV3.4
PD0
  Top 0.203: U$1.P81 30.16,27.92 30.14,27.9 30.14,27.2 28.54,25.6 28.54,22.77 SV1.4
PD1
  Top 0.203: 29.83,24.09 SV1.5 30.66,24.88 U$1.P82
PD2
  Top 0.203: U$1.P83 31.16,22.84 SV1.6
PD8
  Top 0.203: U$1.P55 25.14,40.3 24.94,40.5 24.94,44.75 24.5,45.19 SV2.1
PD9
  Top 0.203: U$1.P56 25.05,39.8 24.54,40.29 24.54,43.53 24.27,43.83 21.05,43.83 19.66,45.21 18.9,45.21 SV2.2
PD11  (via drill 0.25)
  Top 0.203: SV2.3 21.45,42.68 23.94,42.68 24.13,42.49 24.13,40.08 24.8,39.41 24.8,39.11 25.11,38.8 U$1.P58
  Top 0.254: R11.2 12.92,63.21 v12.93,63.2
  Bottom 0.254: v12.93,63.2 13.04,63.2 15.31,60.93 15.31,46.35 16.66,45 16.66,44.16 17.01,43.81 20.27,43.81 SV2.3
PD12  (via drill 0.25)
  Top 0.203: SV2.4 19.31,42.23 20.06,42.23 20.97,41.33 23.45,41.33 23.7,41.08 23.65,39.55 24.9,38.3 U$1.P59
  Top 0.254: R12.2 13.05,61.22 v13.07,61.2
  Bottom 0.254: v13.07,61.2 13.12,61.2 14.61,59.72 14.61,46.32 16.04,44.88 16.04,42.75 16.36,42.43 18.66,42.43 SV2.4
PD13  (via drill 0.25)
  Top 0.203: U$1.P60 24.84,37.8 23.26,39.38 23.26,39.83 23.04,40.05 21.49,40.05 SV2.5
  Top 0.254: R13.2 13.05,59.13 v13.06,59.26
  Bottom 0.254: SV2.5 21.04,40.11 19.8,41.35 15.77,41.35 15.42,41.71 15.42,44.8 13.94,46.28 13.94,58.81 13.83,58.92 13.48,59.26 v13.06,59.26
PD14  (via drill 0.25)
  Top 0.203: U$1.P61 24.75,37.3 23.33,38.73 21.12,38.73 19.8,40.05 18.95,40.05 SV2.6
  Top 0.254: v13.18,57.25 11.78,57.25 R14.2
  Bottom 0.254: SV2.6 15.69,40.11 14.94,40.81 14.94,44.53 13.18,46.35 v13.18,57.25
PD15
  Top 0.203: U$1.P62 24.69,36.8 23.95,37.55 21.45,37.55 SV2.7
PE2
  Top 0.203: U$1.P1 43.96,30.3 44.15,30.12 44.15,29.43 45.36,28.22 45.36,27.94 SV3.16
PE3
  Top 0.203: U$1.P2 44.06,30.8 44.59,30.28 44.59,29.55 45.46,28.67 48,28.67 48.46,28.22 48.46,27.45 SV3.15
PE4
  Top 0.203: U$1.P3 44.54,31.3 SV3.14
PE5
  Top 0.203: U$1.P4 44.85,31.8 45.36,31.29 47.09,31.29 SV3.13
PE6
  Top 0.203: U$1.P5 43.56,32.3 45.59,32.3 45.86,32.52 SV3.12
PH1
  Top 0.203: 45.86,45.22 SV3.2 | 45.82,45.26 SV3.2 | SV3.2 44.26,45.19 42.78,43.72 42.78,36.87 42.22,36.31 U$1.P13
REFCLK
  Top 0.203: 33.84,52.2 35.03,51.02 35.03,49.37 36.26,48.14 39.81,48.14 40.12,47.83 40.12,42.24 40.56,41.8 U$1.P24
  Top 0.254: RN3.5 25.85,59.19 25.94,59.28 28.64,59.28 33.77,54.15 SV5.8 33.84,52.2
RXD0  (via drill 0.51)
  Top 0.254: U$1.P33 36.16,45.74 32.44,49.46 32.44,50.13 31.23,51.34 SV5.10 | v21.05,52.92 20.36,53.61 RN1.2
  Bottom 0.254: SV5.10 30.14,51.16 22.88,51.16 v21.05,52.92
RXD1  (via drill 0.6)
  Top 0.203: RN1.1 19.56,53.13 v19.62,53.06
  Top 0.254: U$1.P34 35.64,44.07 35.64,45.51 31.5,49.66 SV5.9
  Bottom 0.254: SV5.9 30.22,50.71 20.98,50.72 v19.62,53.06
SHIFTREG_CLK
  Top 0.203: U$1.P85 32.16,26.41 33.65,24.91 33.65,22.8 SV1.8
  Top 0.254: SV1.8 32.39,11.31 30.07,9 30.07,2.68 U$8.T32
SHIFTREG_DATA
  Top 0.203: U$1.P86 32.66,26.6 33.97,25.28 34.67,25.28 34.86,25.09 34.86,24.14 SV1.9
  Top 0.254: SV1.9 34.93,23.35 33.65,22.07 33.65,7.29 34.07,6.88 34.07,2.68 U$8.T33
SHIFTREG_ENABLE
  Top 0.203: U$1.P84 31.66,24.8 SV1.7
  Top 0.254: SV1.7 32.39,23.4 31.16,22.18 31.16,10.94 29.34,9.12 29.34,2.69 U$8.T31
SONAR_DAC  (via drill 0.51)
  Top 0.203: 38.19,44.09 38.19,46.47 v37.79,46.87
  Top 0.254: U$1.P29 38.19,44.09
  Bottom 0.254: v37.79,46.87 37.77,46.85 37.76,46.85 37.37,46.54 37.37,41.81 37.55,41.63 38,41.61 38.6,41.61 38.69,41.61 38.94,41.61 39.5,42.17 39.5,42.61 39.77,42.87 44.25,42.86 44.72,42.38 44.72,36.69 45.07,36.35 49.14,36.35 50.24,35.25 50.24,15.68 44.5,9.94 U$8.B46
SONAR_PWM
  Top 0.254: U$1.P89 34.16,26.48 35.96,24.67 35.96,22.57 SV1.10 34.93,2.68 U$8.T34
TEMP_BACKUP
  Top 0.203: U$1.P79 29.16,27.89 29.16,27.88 29.16,27.7 28.66,27.2 26.36,27.2 26.01,26.85 26.01,22.78 SV1.2 24.5,21.27 U$8.T25
TXD0  (via drill 0.51)
  Top 0.254: U$1.P51 25.83,42.38 v25.83,46.03 | SV5.11 28.69,50.62 arc90 28.14,51.18 arc-90 27.45,51.86 RN3.7 27.57,58.49
  Bottom 0.254: SV5.11 28.69,48.9 arc-90 27.59,47.8 arc90 v25.83,46.03
TXD1  (via drill 0.51)
  Top 0.254: U$1.P52 25.97,41.81 26.75,41.81 26.95,42.07 26.95,42.54 26.97,42.56 26.97,48.13 27.47,48.63 27.47,50.95 26.22,52.2 SV5.14 | RN3.8 28.25,54.74 v28.41,54.48
  Bottom 0.254: v28.41,54.48 27.92,53.96 SV5.14
TXEN  (via drill 0.51)
  Top 0.254: U$1.P48 28.67,44.07 28.67,47.45 29.88,48.66 29.88,50.32 28.69,51.51 SV5.12 | RN3.6 26.59,58.54 v26.59,56.12
  Bottom 0.254: v26.59,56.12 27.69,56.12 29.39,55.11 29.39,52.9 SV5.12
USB_D+  (via drill 0.25)
  Top 0.203: v24.42,31 24.99,31.55 24.99,32.18 25.16,32.3 U$1.P71
  Top 0.406: RN2.3 8.58,31.8 v8.58,31.67
  Bottom 0.203: v24.42,31 24.05,31.25 18.37,31.25 17.96,31.67 v8.58,31.67
USB_D-  (via drill 0.25)
  Top 0.203: U$1.P70 25.07,32.8 v24.36,32.44
  Top 0.406: RN2.4 8.5,32.6 v8.5,32.64
  Bottom 0.203: v24.36,32.44 24.26,32.45 23.12,33.64 18.03,33.64 17.02,32.63 15.6,32.63 15.57,32.64 v8.5,32.64
XTAL1
  Top 0.254: U$4.5 17.5,59.97 16.31,58.79 16.31,51.03 Q2.3
YELLOW
  Bottom 0.254: R15.2 17.56,86.9 U$7.11

## Text on the board
tPlace: NRST | TXEN | RXD0 | REFCLK | +3V3 | TXD1 | +3V3 | TXD0 | CRS_DV | RXD1 | MDC | GND | PD9 | PD8 | BOOT | PH1 | PD11 | PD12 | OSC_In | PC15 | PD14 | PD13 | PC13 | PC14 | PC6 | PD15 | GND | +3V3 | PC7 | PC8 | +3V3 | GND | SDA2 | SCL2 | PE6 | GND | PA11 | PE4 | PE5 | PA9 | ShiftDat | CAN_TX | PE3 | PC12 | PD1 | ShiftEn | Cam_M | +3V3 | GND | PC11 | SCL1 | CAM_2 | Temp | PD0 | PD2 | ShiftClk | SonarPwm | CAN_RX | SDA1
bPlace: RXD0 | TXEN | REFCLK | TXD1 | MDIO | GND | TXD0 | GND | +3V3 | GND | PD9 | MDC | PD8 | RXD1 | PH1 | CRS_DV | OSC_IN | PD12 | PD11 | PC15 | PD14 | PC14 | PD13 | PC13 | GND | PC6 | PD15 | +3V3 | GND | PC8 | PC7 | SDA2 | PE6 | GND | SCL2 | PE4 | PA11 | PE5 | PA9 | PC12 | PD1 | ShiftDat | PE3 | +3V3 | GND | ShiftEn | Cam_M | CAN_TX | PE2 | PC11 | SCL1 | CAM2 | PD2 | ShiftClk | Sonar_PWM | CAN_RX | SDA1 | Temp | PD0
_tsilk: Purdue ROV 2015/16 / Made by Sam Deghuee / and Luke McBee | MDIO | PE2